# EAGLE board OpenPad (EAGLE 6.4)
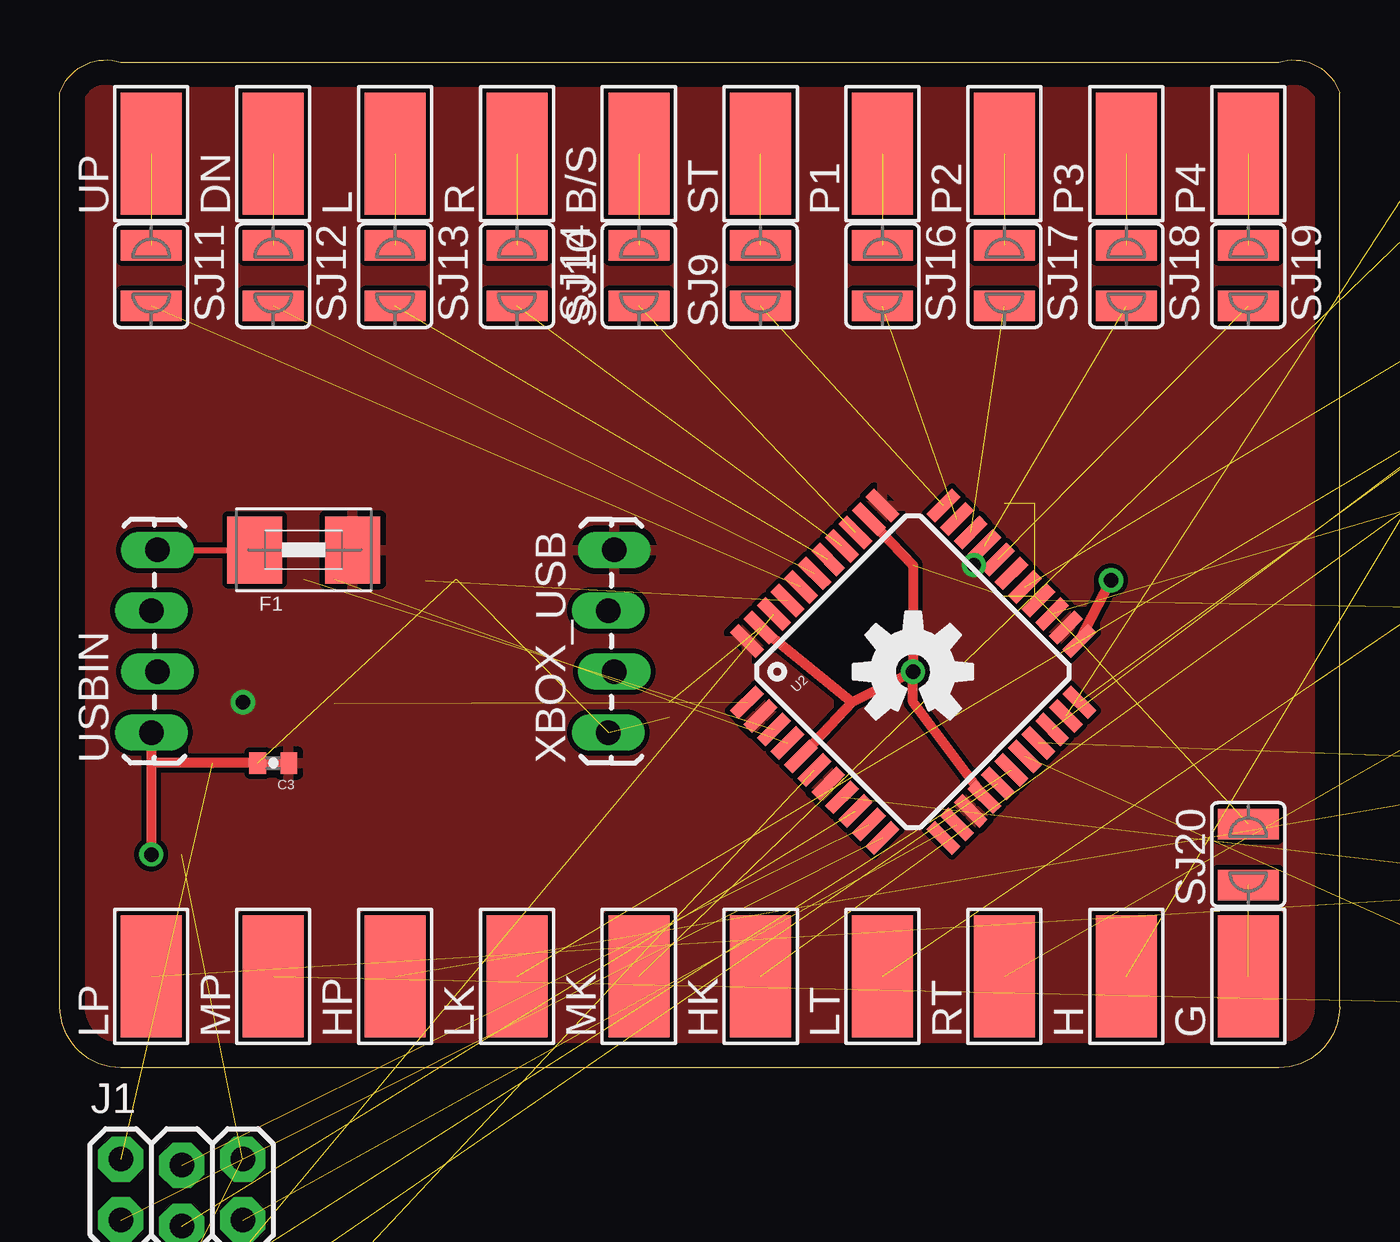
[diagram p0: board, top side]
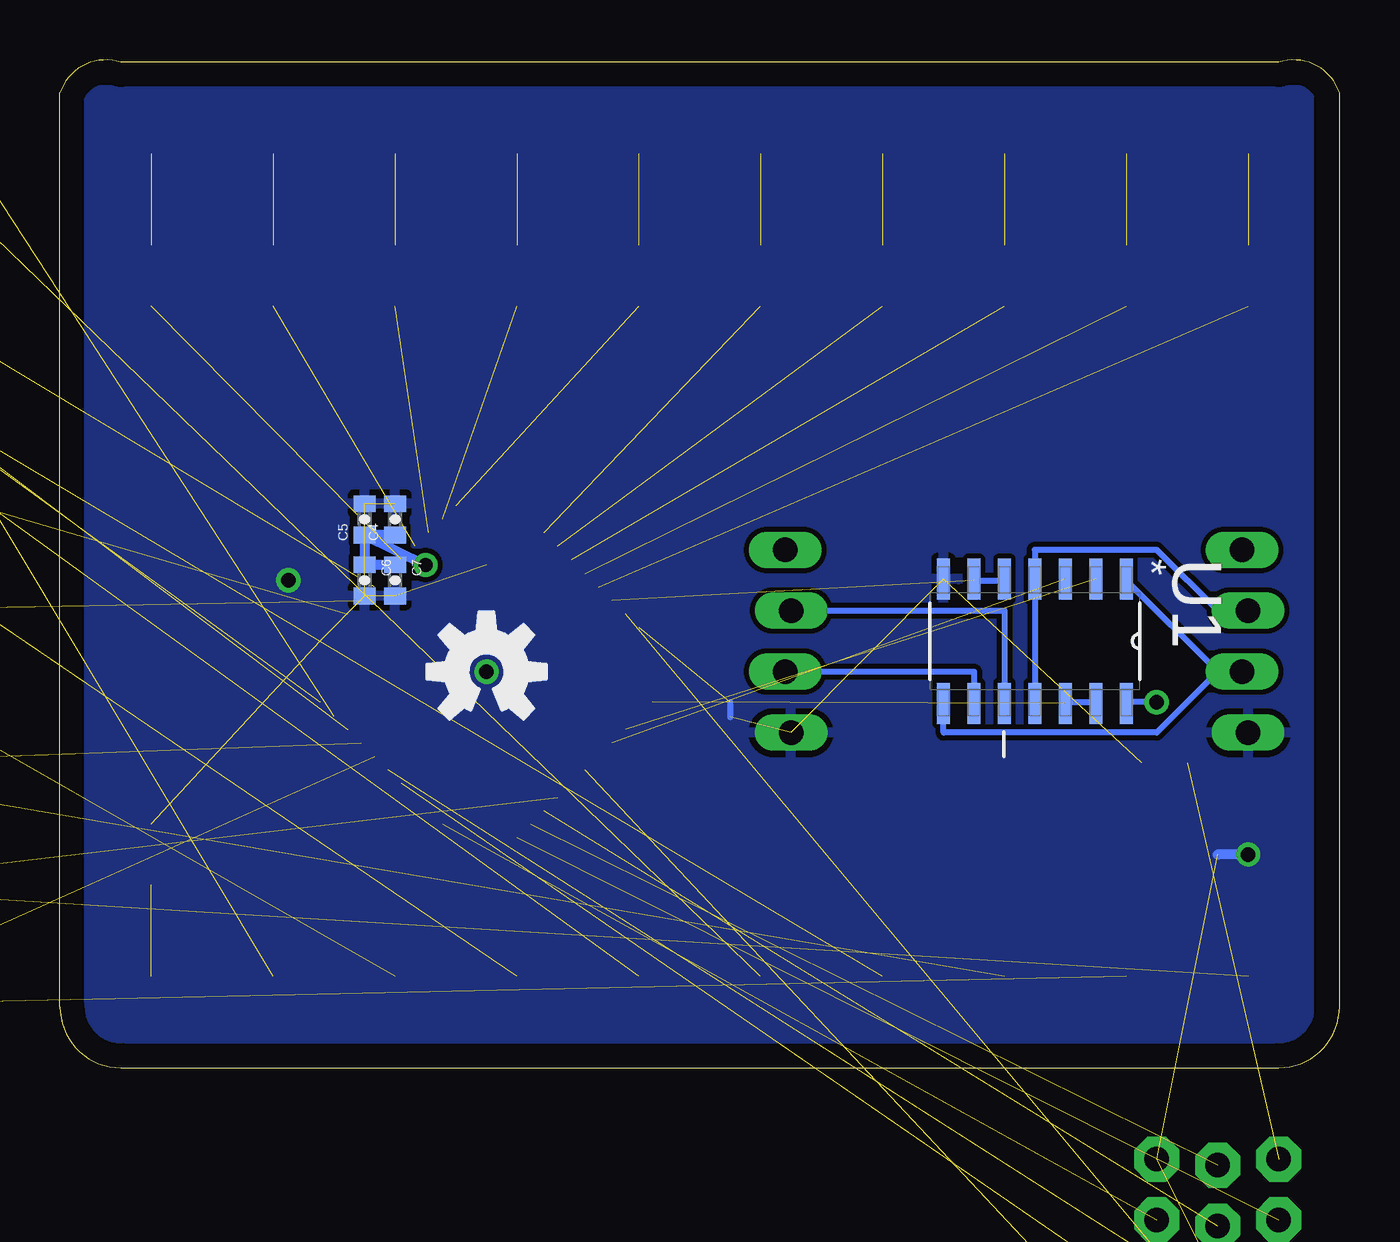
[diagram p1: board, bottom side, seen from below]

Size 53.34 x 42.01 mm. Coordinates in mm from the lower left corner, seen from the top.
Outline: 2.54,0 arc-90 0,2.54 0,40.64 arc-90 2.54,41.91 50.8,41.91 arc-90 53.34,40.64 53.34,2.54 arc-90 50.8,0 2.54,0
Copper layers (1*16): Top 0.035mm / dielectric 1.5mm / Bottom 0.035mm
Design rules "default": minimum track width 10mil, minimum drill 24mil, track to track 8mil, track to pad 8mil, pad to pad 8mil, via to via 8mil, smd to smd 8mil, copper to edge 40mil, drill to drill 8mil, minimum pad ring 10mil, minimum via ring 8mil, stop-mask expansion 4mil, vias tented up to drill 0mil, thermal gap 10mil

## Footprints (pad centres in the part's own frame; a part is rotated, then mirrored left to right if it is on the bottom)
5-2,5 = smd 2.54 x 5.08: 1 0,0
0402-CAP = smd 0.7 x 0.9: 1 -0.65,0; 2 0.65,0
1812 = smd 2.286 x 2.794: 1 -2.046,0; 2 2.046,0
2X3_LOCK = drill 1.016 pad 1.88 octagon: 1 0,0; 2 0,2.54; 3 2.54,-0.254; 4 2.54,2.286; 5 5.08,0; 6 5.08,2.54
CSTCR6M = smd 0.8 x 2.6: 1 -1.5,0; 2 0,0; 3 1.5,0
SJW = smd 1.27 x 2.54: 1 -1.27,0; 2 1.27,0
PAD.02X.02 = smd 0.508 x 0.508: P$1 0,0
SOIC127P600X175-14N = smd 1.702 x 0.533: 1 -2.591,3.81; 2 -2.591,2.54; 3 -2.591,1.27; 4 -2.591,0; 5 -2.591,-1.27; 6 -2.591,-2.54; 7 -2.591,-3.81; 8 2.591,-3.81; 9 2.591,-2.54; 10 2.591,-1.27; 11 2.591,0; 12 2.591,1.27; 13 2.591,2.54; 14 2.591,3.81
SPARKFUN-DIGITALIC_TQFP44 = smd 1.5 x 0.5: 1 -5.8,4; 2 -5.8,3.2; 3 -5.8,2.4; 4 -5.8,1.6; 5 -5.8,0.8; 6 -5.8,0; 7 -5.8,-0.8; 8 -5.8,-1.6; 9 -5.8,-2.4; 10 -5.8,-3.2; 11 -5.8,-4; 23 5.8,-4; 24 5.8,-3.2; 25 5.8,-2.4; 26 5.8,-1.6; 27 5.8,-0.8; 28 5.8,0; 29 5.8,0.8; 30 5.8,1.6; 31 5.8,2.4; 32 5.8,3.2; 33 5.8,4 | smd 0.5 x 1.5: 12 -4,-5.8; 13 -3.2,-5.8; 14 -2.4,-5.8; 15 -1.6,-5.8; 16 -0.8,-5.8; 17 0,-5.8; 18 0.8,-5.8; 19 1.6,-5.8; 20 2.4,-5.8; 21 3.2,-5.8; 22 4,-5.8; 34 4,5.8; 35 3.2,5.8; 36 2.4,5.8; 37 1.6,5.8; 38 0.8,5.8; 39 0,5.8; 40 -0.8,5.8; 41 -1.6,5.8; 42 -2.4,5.8; 43 -3.2,5.8; 44 -4,5.8
1X04_LOCK_LONGPADS = drill 1.016 long: 1 0,0; 2 2.54,-0.254; 3 5.08,0; 4 7.62,-0.254

## Placement (x,y rotation side)
B/S  BACK/SELECT  [5-2,5]  24.13,38.1 0 top
C1  1uF  [0402-CAP]  2.54,-17.78 0 top  (outside the outline)
C3  0.1uF  [0402-CAP]  8.89,12.7 180 top
C4  0.1uF  [0402-CAP]  39.37,22.86 90 bottom
C5  0.1uF  [0402-CAP]  40.64,22.86 90 bottom
C6  0.1uF  [0402-CAP]  40.64,20.32 270 bottom
C7  0.1uF  [0402-CAP]  39.37,20.32 270 bottom
DN  DOWN  [5-2,5]  8.89,38.1 0 top
F1  500mA  [1812]  10.16,21.59 0 top
G  GND  [5-2,5]  49.53,3.81 0 top
H  HOME  [5-2,5]  44.45,3.81 0 top
HK  HK  [5-2,5]  29.21,3.81 0 top
HP  HP  [5-2,5]  13.97,3.81 0 top
J1  [2X3_LOCK]  2.54,-6.35 0 top  (outside the outline)
L  LEFT  [5-2,5]  13.97,38.1 0 top
LK  LK  [5-2,5]  19.05,3.81 0 top
LOGO1  OSHW-LOGOM  [OSHW-LOGO-M]  35.56,16.51 0 bottom
LOGO2  OSHW-LOGOM  [OSHW-LOGO-M]  35.56,16.51 0 top
LP  LP  [5-2,5]  3.81,3.81 0 top
LT  LT  [5-2,5]  34.29,3.81 0 top
MK  MK  [5-2,5]  24.13,3.81 0 top
MP  MP  [5-2,5]  8.89,3.81 0 top
P1  P1  [5-2,5]  34.29,38.1 0 top
P2  P2  [5-2,5]  39.37,38.1 0 top
P3  P3  [5-2,5]  44.45,38.1 0 top
P4  P4  [5-2,5]  49.53,38.1 0 top
Q1  16MHz  [CSTCR6M]  3.81,-11.43 0 top  (outside the outline)
R  RIGHT  [5-2,5]  19.05,38.1 0 top
RT  RT  [5-2,5]  39.37,3.81 0 top
SJ1  [SJW]  64.77,7.62 0 top  (outside the outline)
SJ2  [SJW]  64.77,2.54 0 top  (outside the outline)
SJ3  [SJW]  64.77,12.7 0 top  (outside the outline)
SJ4  [SJW]  71.12,35.56 0 top  (outside the outline)
SJ5  [SJW]  58.42,38.1 0 top  (outside the outline)
SJ6  [SJW]  64.77,30.48 0 top  (outside the outline)
SJ7  [SJW]  64.77,25.4 0 top  (outside the outline)
SJ8  [SJW]  64.77,19.05 0 top  (outside the outline)
SJ9  [SJW]  29.21,33.02 90 top
SJ10  [SJW]  24.13,33.02 90 top
SJ11  [SJW]  3.81,33.02 270 top
SJ12  [SJW]  8.89,33.02 270 top
SJ13  [SJW]  13.97,33.02 270 top
SJ14  [SJW]  19.05,33.02 270 top
SJ15  [SJW]  64.77,35.56 0 top  (outside the outline)
SJ16  [SJW]  34.29,33.02 270 top
SJ17  [SJW]  39.37,33.02 270 top
SJ18  [SJW]  44.45,33.02 270 top
SJ19  [SJW]  49.53,33.02 270 top
SJ20  [SJW]  49.53,8.89 90 top
ST  START  [5-2,5]  29.21,38.1 0 top
TP1  AREF  [PAD.02X.02]  1.27,-15.24 0 top  (outside the outline)
U1  4066D  [SOIC127P600X175-14N]  12.7,17.78 270 bottom
U2  ATMEGA32U4TQFP  [SPARKFUN-DIGITALIC_TQFP44]  35.56,16.51 45 top
UP  UP  [5-2,5]  3.81,38.1 0 top
USBIN  [1X04_LOCK_LONGPADS]  3.81,13.97 90 top
XBOX_USB  [1X04_LOCK_LONGPADS]  22.86,13.97 90 top

## Library data of the parts
B/S DN G H HK HP L LK LP LT MK MP P1-P4 R RT ST UP = wirepad
C1 C3-C7 = SparkFun-Capacitors; PROD_ID: CAP-00810
F1 = adafruit
J1 USBIN XBOX_USB = SparkFun-Connectors
LOGO1 LOGO2 = SparkFun-Aesthetics
Q1 = murata-filter; MPN: CSTCR6M00G53-R0; OC_FARNELL: 1170434; OC_NEWARK: 25M8759
SJ1-SJ20 = jumper
TP1 = SparkFun-Passives
U1 = NXP_By_element14_Batch_1; MPN: 74HC4066D; OC_FARNELL: 1201330; OC_NEWARK: 26M7766; PACKAGE: SOIC-14; SUPPLIER: NXP
U2 = SparkFun-DigitalIC

## Nets
BACK/SELECT: SJ10.1 U2.36
D+: U1.4 U1.11 USBIN.3
D-: U1.1 U1.8 USBIN.2
DOWN: SJ12.2 U2.39
GND: C1.1 C3.2 C4.2 C5.2 C6.2 C7.2 J1.6 Q1.2 SJ20.2 U1.7 U2.5 U2.15 U2.23 U2.35 U2.43 USBIN.1 XBOX_USB.1
HK: SJ6.1 U2.22
HOME: SJ15.2 U2.27
HP: SJ3.1 U2.19
LEFT: SJ13.2 U2.38
LK: SJ4.1 U2.20
LP: SJ1.1 U2.8
LT: SJ7.1 U2.25
MISO: J1.1 U2.11
MK: SJ5.1 U2.21
MOSI: J1.4 U2.10
MP: SJ2.1 U2.18
N$1: Q1.3 U2.16
N$2: Q1.1 U2.17
N$3: LP.1 SJ1.2
N$4: F1.1 USBIN.4
N$5: MP.1 SJ2.2
N$6: HP.1 SJ3.2
N$7: LK.1 SJ4.2
N$8: MK.1 SJ5.2
N$9: HK.1 SJ6.2
N$10: LT.1 SJ7.2
N$11: RT.1 SJ8.2
N$12: SJ9.2 ST.1
N$13: B/S.1 SJ10.2
N$14: SJ11.1 UP.1
N$15: DN.1 SJ12.1
N$16: L.1 SJ13.1
N$17: R.1 SJ14.1
N$18: H.1 SJ15.1
N$19: P2.1 SJ17.1
N$20: P3.1 SJ18.1
N$21: P4.1 SJ19.1
N$22: G.1 SJ20.1
N$23: P1.1 SJ16.1
N$24: TP1.P$1 U2.42
N$25: C1.2 U2.6
OP_EN: U1.5 U1.6 U2.41
OPD+: U1.3 U2.4
OPD-: U1.2 U2.3
P1: SJ16.2 U2.32
P2: SJ17.2 U2.31
P3: SJ18.2 U2.30
P4: SJ19.2 U2.29
RESET: J1.5 U2.13
RIGHT: SJ14.2 U2.37
RT: SJ8.1 U2.26
SCK: J1.3 U2.9
START: SJ9.1 U2.33
UP: SJ11.2 U2.40
VCC: C3.1 C4.1 C5.1 C6.1 C7.1 F1.2 J1.2 U1.14 U2.2 U2.7 U2.14 U2.24 U2.34 U2.44 XBOX_USB.4
XB_EN: U1.12 U1.13 U2.1
XD+: U1.10 XBOX_USB.3
XD-: U1.9 XBOX_USB.2

## Tracks (layer width: path | path; a pad name or v marks a point on that pad's centre or on a via)
BACK/SELECT  (1 unrouted)
D+
  Bottom 0.254: U1.11 U1.4 12.7,21.59 7.62,21.59 5.08,19.05 USBIN.3
D-
  Bottom 0.254: 5.08,16.51 7.62,13.97 16.51,13.97 U1.8 16.51,15.24 | 5.08,16.51 8.89,20.32 U1.1 | 5.08,16.51 USBIN.2
DOWN  (1 unrouted)
GND  (via drill 0.6, 0.6 pad 0.25)  (13 unrouted)
  Top 0.406: U2.23 v43.82,20.32 | U2.35 35.56,20.95 v35.56,16.51 | U2.43 33.02,15.24 | 33.02,15.24 v35.56,16.51 | U2.5 33.02,15.24 | U2.15 35.56,15.24 v35.56,16.51 | USBIN.1 3.81,12.7 | 3.81,12.7 v3.81,8.89 | C3.2 3.81,12.7
  Bottom 0.254: 25.4,15.24 25.4,14.62
  Bottom 0.406: v3.81,8.89 5.08,8.89
  pour Bottom: 1.27,41.91 53.34,41.91 53.34,0 1.27,0
HK  (1 unrouted)
HOME  (1 unrouted)
HP  (1 unrouted)
LEFT  (1 unrouted)
LK  (1 unrouted)
LP  (1 unrouted)
LT  (1 unrouted)
MISO  (1 unrouted)
MK  (1 unrouted)
MOSI  (1 unrouted)
MP  (1 unrouted)
N$1  (1 unrouted)
N$2  (1 unrouted)
N$3  (1 unrouted)
N$4
  Top 0.254: USBIN.4 F1.1
N$5  (1 unrouted)
N$6  (1 unrouted)
N$7  (1 unrouted)
N$8  (1 unrouted)
N$9  (1 unrouted)
N$10  (1 unrouted)
N$11  (1 unrouted)
N$12  (1 unrouted)
N$13  (1 unrouted)
N$14  (1 unrouted)
N$15  (1 unrouted)
N$16  (1 unrouted)
N$17  (1 unrouted)
N$18  (1 unrouted)
N$19  (1 unrouted)
N$20  (1 unrouted)
N$21  (1 unrouted)
N$22  (1 unrouted)
N$23  (1 unrouted)
N$24  (1 unrouted)
N$25  (1 unrouted)
OP_EN  (1 unrouted)
  Bottom 0.254: U1.5 13.97,20.32 15.24,20.32 U1.6
OPD+  (1 unrouted)
OPD-  (1 unrouted)
P1  (1 unrouted)
P2  (1 unrouted)
P3  (1 unrouted)
P4  (1 unrouted)
RESET  (1 unrouted)
RIGHT  (1 unrouted)
RT  (1 unrouted)
SCK  (1 unrouted)
START  (1 unrouted)
UP  (1 unrouted)
VCC  (via drill 0.6 pad 0.25, 0.61)  (1 unrouted)
  Top 0.406: C3.1 6.35,12.7
  Bottom 0.254: v7.62,15.24 8.89,15.24 U1.14
  Bottom 0.406: C4.1 C5.1 | C5.1 C6.1 C7.1 | C5.1 v38.1,20.95
  pour Top: 1.27,41.91 53.34,41.91 53.34,0 1.27,0
XB_EN  (1 unrouted)
  Bottom 0.254: U1.13 10.16,15.24 11.43,15.24 U1.12
XD+
  Bottom 0.254: U1.10 13.97,19.05 XBOX_USB.3
XD-
  Bottom 0.254: U1.9 15.24,16.51 XBOX_USB.2